# EAGLE board TorqueDroid (EAGLE 8.3.0)
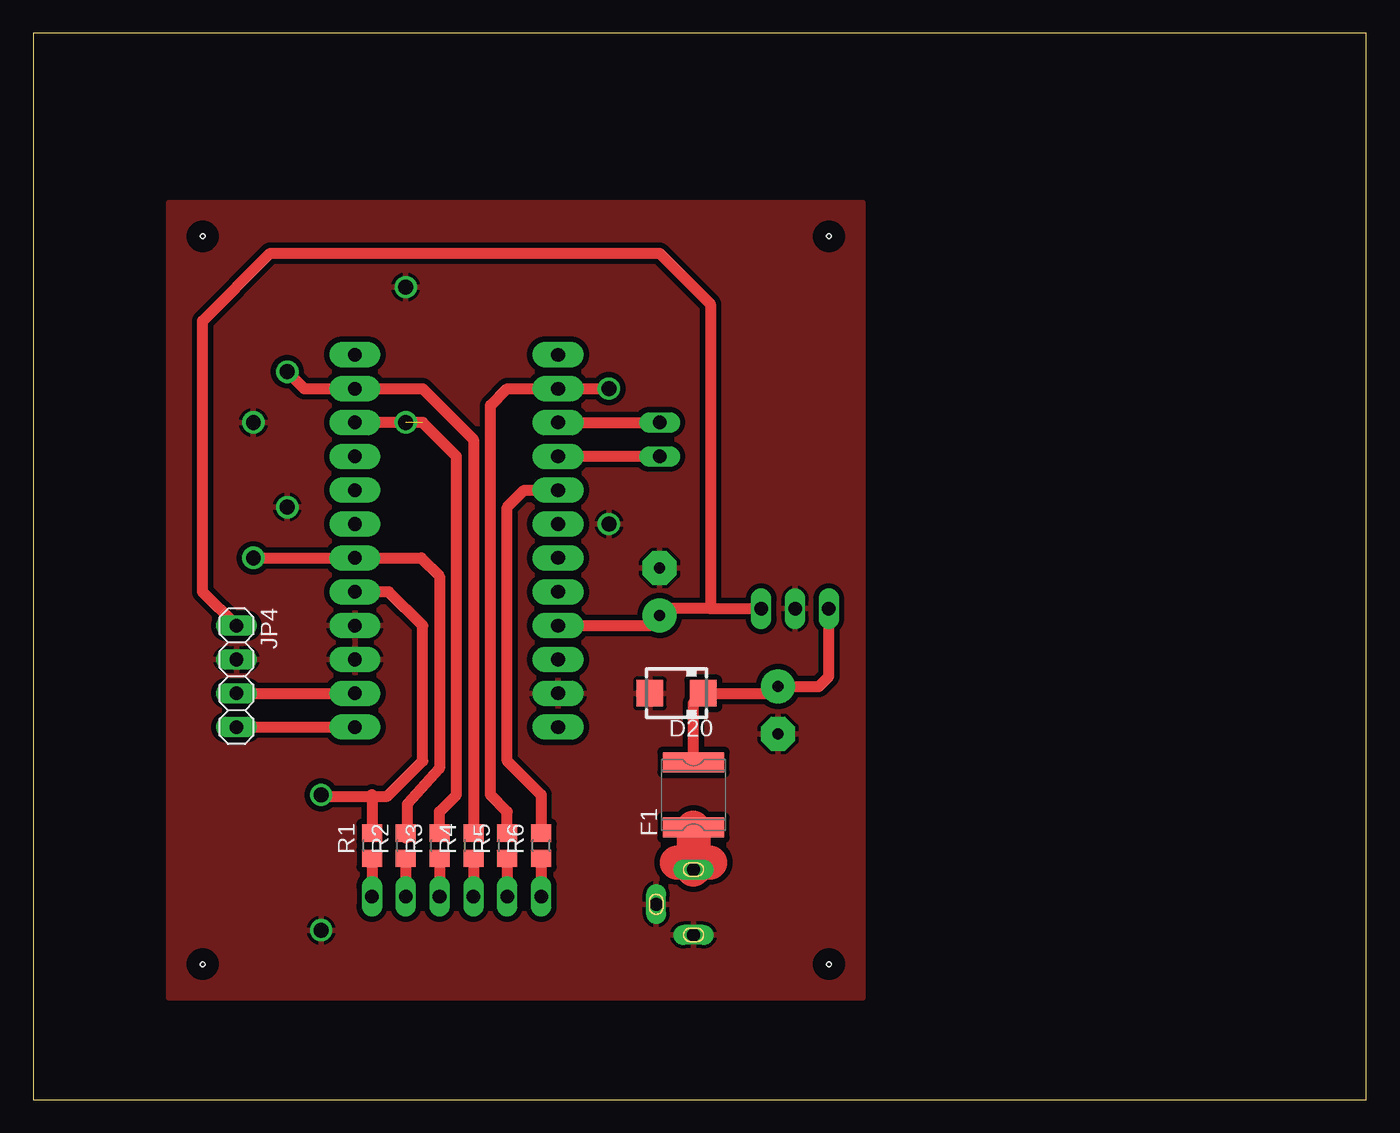
[diagram p0: board, top side]
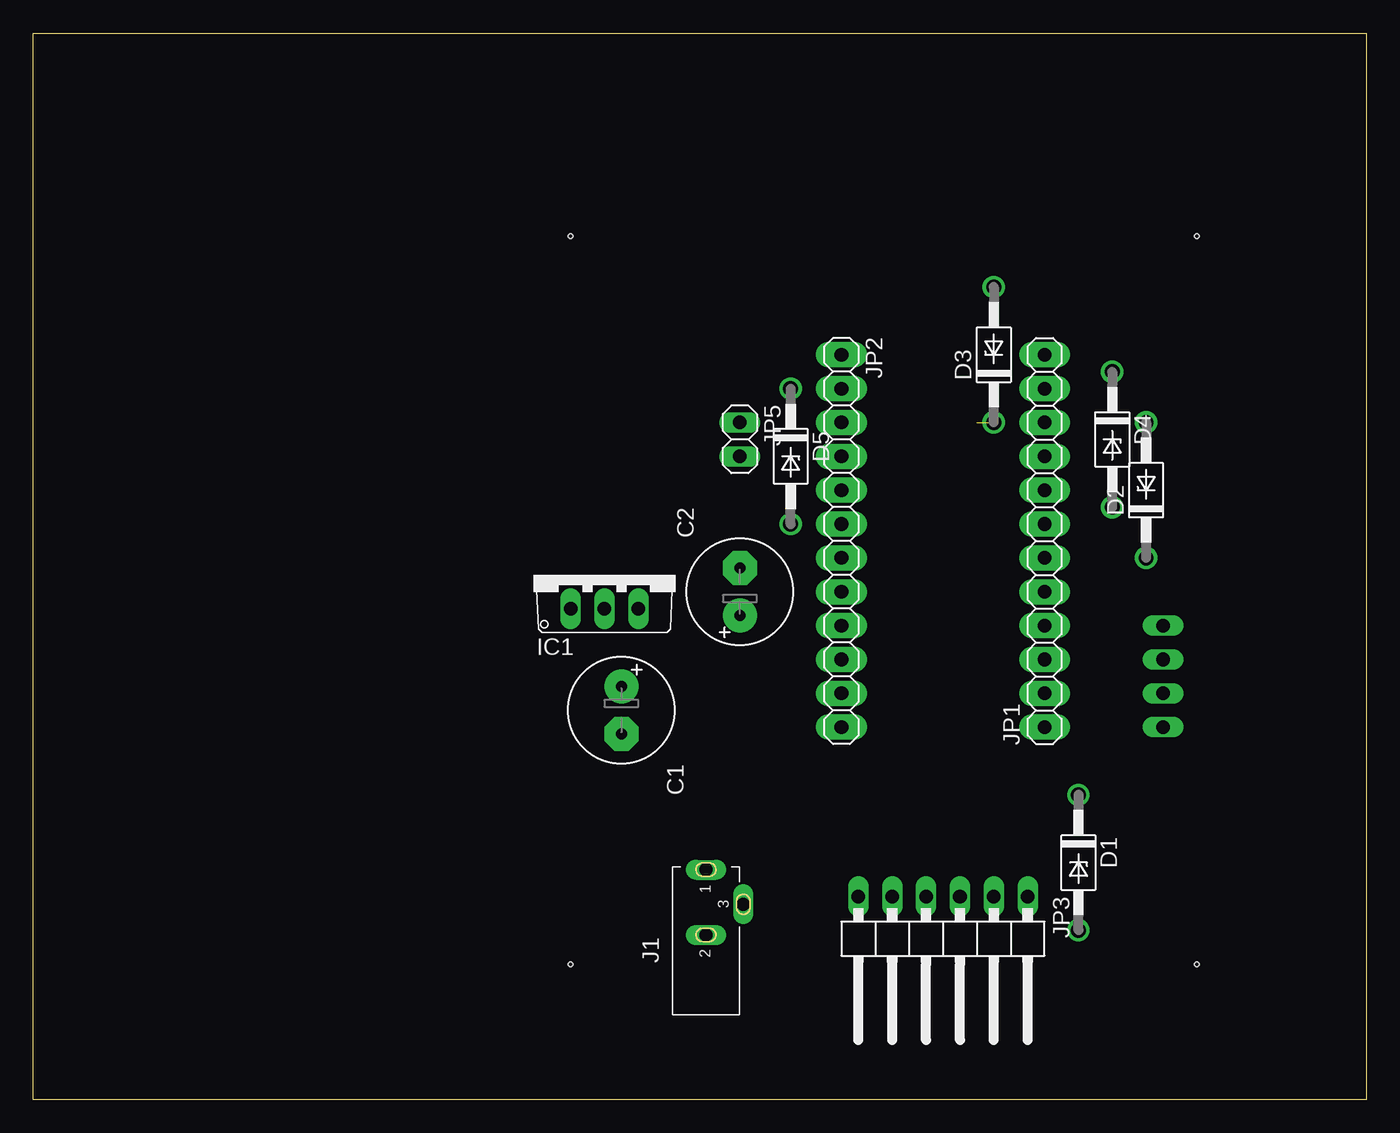
[diagram p1: board, bottom side, seen from below]

Size 100 x 80 mm. Coordinates in mm from the lower left corner, seen from the top.
Outline: 0,0 100,0 100,80 0,80 0,0
Copper layers (1*16): Top 0.035mm / dielectric 1.5mm / Bottom 0.035mm
Design rules "default": minimum track width 6mil, minimum drill 0.35mm, track to track 6mil, track to pad 6mil, pad to pad 6mil, via to via 6mil, smd to smd 6mil, copper to edge 40mil, drill to drill 6mil, minimum pad ring 10mil, minimum via ring 8mil, stop-mask expansion 4mil, vias tented up to drill 0mil, thermal gap 10mil
Net classes: 0 default: width 0.762 mm, drill 0.254 mm, clearance 0.127 mm
Holes 0.35 mm at 12.7,64.77 59.69,64.77 59.69,10.16 12.7,10.16

## Footprints (pad centres in the part's own frame; a part is rotated, then mirrored left to right if it is on the bottom)
E3,5-10 = drill 0.813 pad 2.54: + -1.778,0 | drill 0.813 pad 2.54 octagon: - 1.778,0
DO41Z10 = drill 1.118: A 5.08,0; C -5.08,0
SMA = smd 2 x 2: A 2,0; C -2,0
MF-SMDF050 = smd 1.5 x 4.6: 1 -2.45,0; 2 2.45,0
TO220V = drill 1.016 long: 1 -2.54,-2.54; 2 0,-2.54; 3 2.54,-2.54
69410X303002 = drill 1 pad 1.5 long: 1 10.9,0; 2 6,0; 3 8.3,-2.8
1X12 = drill 1.016 pad 1.93 long: 1 -13.97,0; 2 -11.43,0; 3 -8.89,0; 4 -6.35,0; 5 -3.81,0; 6 -1.27,0; 7 1.27,0; 8 3.81,0; 9 6.35,0; 10 8.89,0; 11 11.43,0; 12 13.97,0
1X06/90 = drill 1.016 long: 1 -6.35,-3.81; 2 -3.81,-3.81; 3 -1.27,-3.81; 4 1.27,-3.81; 5 3.81,-3.81; 6 6.35,-3.81
1X04 = drill 1.016 long: 1 -3.81,0; 2 -1.27,0; 3 1.27,0; 4 3.81,0
1X02 = drill 1.016 long: 1 -1.27,0; 2 1.27,0
R0805 = smd 1.3 x 1.5: 1 -0.95,0; 2 0.95,0

## Placement (x,y rotation side)
C1  470u  [E3,5-10]  55.88,29.21 270 bottom
C2  470u  [E3,5-10]  46.99,38.1 90 bottom
D1  1N4728  [DO41Z10]  21.59,17.78 270 bottom
D2  1N4728  [DO41Z10]  16.51,45.72 90 bottom
D3  1N4728  [DO41Z10]  27.94,55.88 90 bottom
D4  1N4728  [DO41Z10]  19.05,49.53 270 bottom
D5  1N4728  [DO41Z10]  43.18,48.26 270 bottom
D20  GS1M  [SMA]  48.26,30.48 180 top
F1  750mA  [MF-SMDF050]  49.53,22.86 90 top
IC1  7805TV  [TO220V]  57.15,39.37 0 bottom
J1  [69410X303002]  49.53,6.35 90 bottom
JP1  [1X12]  24.13,41.91 90 bottom
JP2  [1X12]  39.37,41.91 270 bottom
JP3  [1X06/90]  31.75,11.43 180 bottom
JP4  [1X04]  15.24,31.75 270 top
JP5  [1X02]  46.99,49.53 270 bottom
R1  [R0805]  25.4,19.05 90 top
R2  [R0805]  27.94,19.05 90 top
R3  [R0805]  30.48,19.05 90 top
R4  [R0805]  33.02,19.05 90 top
R5  [R0805]  35.56,19.05 90 top
R6  [R0805]  38.1,19.05 90 top

## Library data of the parts
C1 C2 R1-R6 = rcl
D1-D5 D20 = diode
F1 = fuse
IC1 = linear
J1 = Wurth_Elektronik_Electromechanic_DC_Power_Jack_Connectors_rev16b
JP1 JP2 = pinhead1
JP3-JP5 = pinhead

## Nets
2: D1.C JP1.5 R1.2
3: D2.C JP1.6 R2.2
4: JP1.7
5: JP1.8
6: JP1.9
7: D3.C JP1.10 R3.2
8: D4.C JP1.11 R4.2
9: JP1.12
10: JP2.1
14: JP2.3 JP5.1
15: JP2.4 JP5.2
16: D5.C JP2.2 R5.2
+5V: C2.+ IC1.3 JP2.9 JP4.1
+9V: C1.+ D20.C F1.2 IC1.1
A0: JP2.5 R6.2
A1: JP2.6
A2: JP2.7
A3: JP2.8
GND: C1.- C2.- D1.A D2.A D3.A D4.A D5.A D20.A IC1.2 J1.2 J1.3 JP1.3 JP1.4 JP2.11 JP4.2
N$1: JP3.1 R1.1
N$2: JP3.2 R2.1
N$3: JP3.3 R3.1
N$4: JP3.4 R4.1
N$5: JP3.5 R5.1
N$6: JP3.6 R6.1
POWER: F1.1 J1.1
RAW: JP2.12
RST: JP2.10
RXI: JP1.2 JP4.3
TX0: JP1.1 JP4.4

## Tracks (layer width: path | path; a pad name or v marks a point on that pad's centre or on a via)
2
  Top 0.813: 25.4,22.86 25.4,22.75 | 25.4,22.75 R1.2 | JP1.5 26.67,38.1 29.21,35.56 29.21,25.4 26.55,22.75 25.4,22.75 | D1.C 21.7,22.75 25.4,22.75
3
  Top 0.813: R2.2 27.94,19.61 28.07,19.74 28.07,22.17 30.48,24.84 30.48,39.27 29.11,40.64 JP1.6 D2.C
7  (1 unrouted)
  Top 0.813: JP1.10 29.21,50.8 31.75,48.26 31.75,22.86 30.48,21.59 R3.2
8
  Top 0.813: R4.2 33.02,49.53 29.21,53.34 JP1.11 20.32,53.34 D4.C
14
  Top 0.813: JP2.3 JP5.1
15
  Top 0.813: JP5.2 JP2.4
16
  Top 0.813: R5.2 35.56,21.59 34.29,22.86 34.29,52.07 35.56,53.34 JP2.2 D5.C
+5V
  Top 0.813: 50.8,36.83 IC1.3 | 50.8,36.83 47.5,36.83 C2.+ 46.23,35.56 JP2.9 | 50.8,36.83 50.8,59.69 46.99,63.5 17.78,63.5 12.7,58.42 12.7,38.1 JP4.1
+9V
  Top 0.813: IC1.1 59.69,31.75 58.93,30.99 C1.+ 55.37,30.48 D20.C 49.53,29.75 F1.2
A0
  Top 0.813: R6.2 38.1,22.86 35.56,25.4 35.56,44.45 36.83,45.72 JP2.5
GND
  pour Top (isolate 0.406): 10.16,67.31 10.16,7.62 62.23,7.62 62.23,67.31
N$1
  Top 0.813: R1.1 JP3.1
N$2
  Top 0.813: R2.1 JP3.2
N$3
  Top 0.813: R3.1 JP3.3
N$4
  Top 0.813: R4.1 JP3.4
N$5
  Top 0.813: R5.1 JP3.5
N$6
  Top 0.813: R6.1 JP3.6
POWER
  Top 2.54: F1.1 J1.1 50.06,17.78 50.8,17.78 48.26,17.78
RXI
  Top 0.813: JP4.3 JP1.2
TX0
  Top 0.813: JP4.4 JP1.1